# Altium PCB SPECCY2007.PcbDoc (part 2 of 2)
Units mil, origin at the board's own origin, x right, y up, seen from the top; angles counter-clockwise.
Board outline 6000 x 4400 mil, 2 copper layers (Top Layer, Bottom Layer); 54 components, 103 nets, 437 pads, 186 vias.
Unrouted connection lines stored in the file: 2.
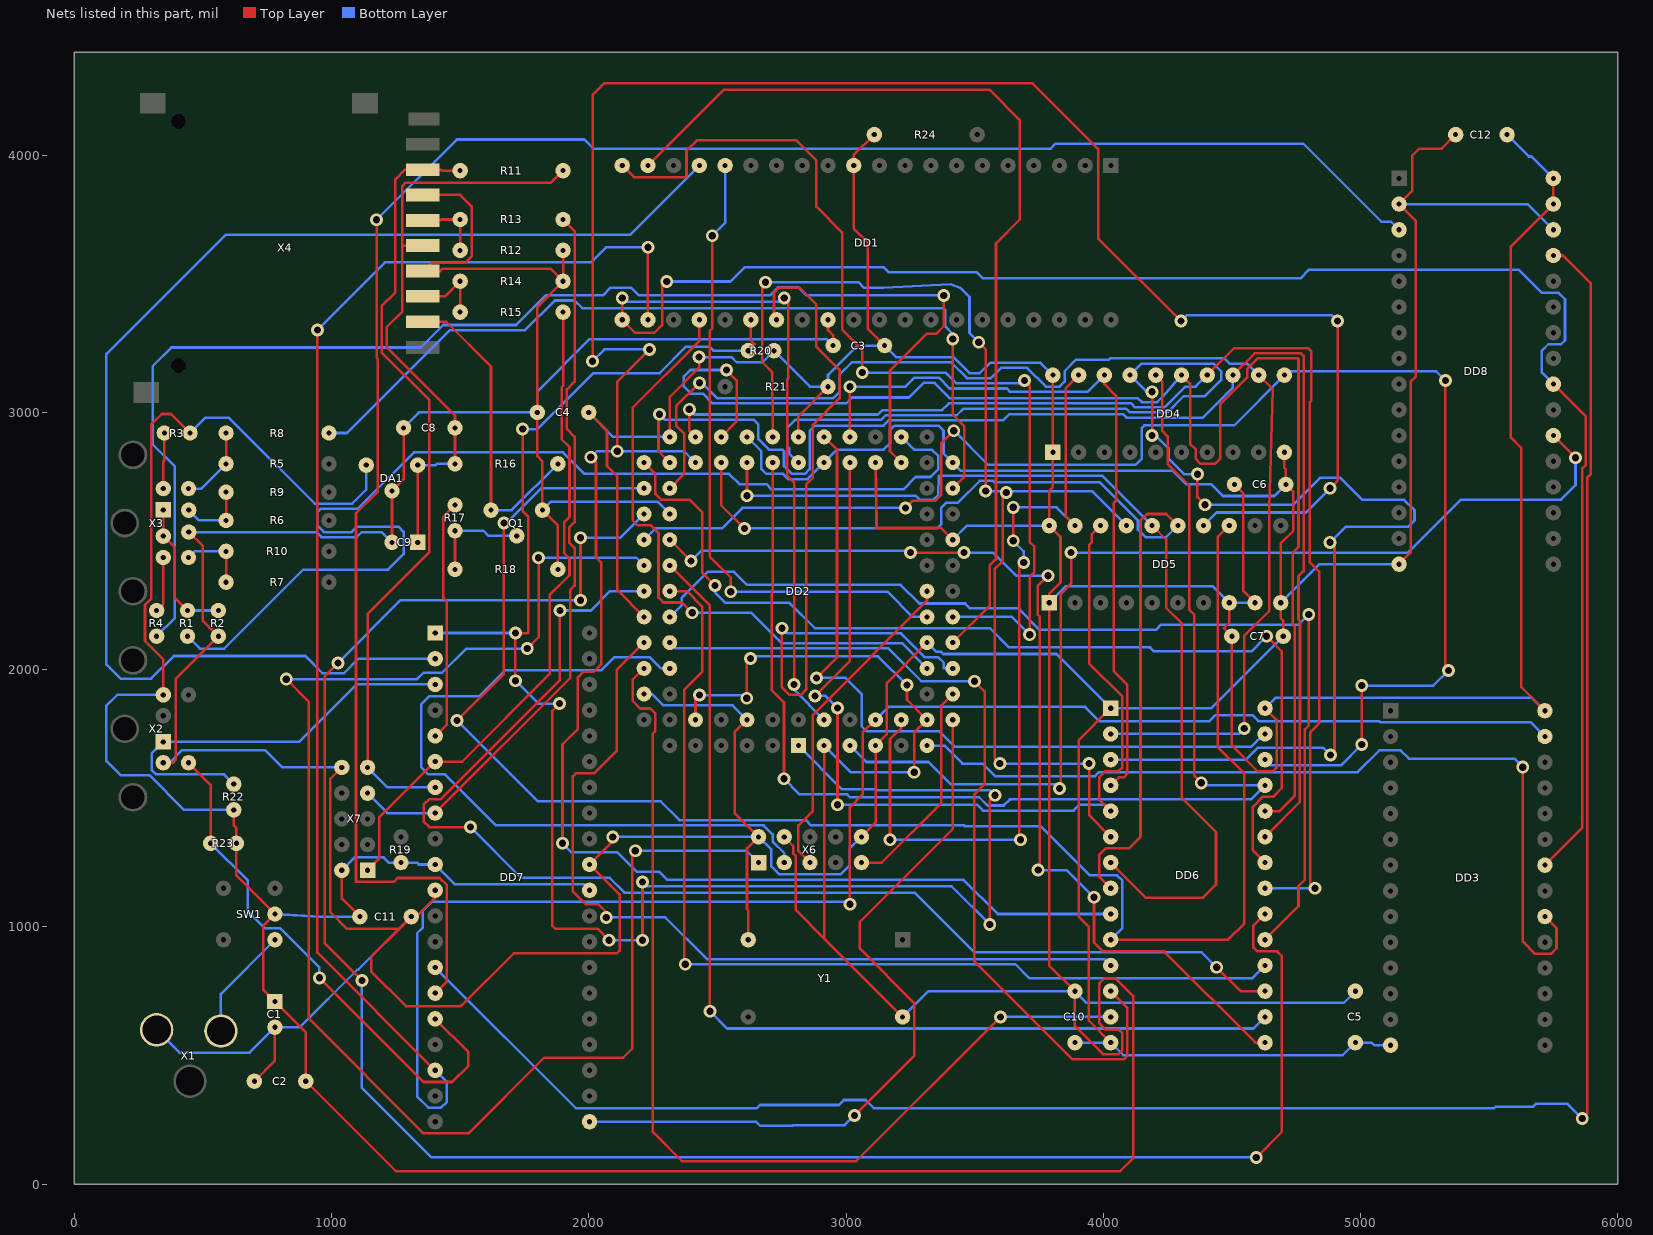
[diagram p2: the nets of this part, all layers, seen from the top]

## Via types
v1: diameter 50, hole 28, Top Layer to Bottom Layer, tented both sides, 186 vias

## Nets (pads, with @x,y where several pads share a name; then routed paths per layer and width w, separated by ;. In a path a pad name is that pad's centre, name@x,y a point inside that pad or via, vN(x,y) a via of type N, cw(c..) or ccw(c..) an arc to the next point about the centre after c; other vN are vias at no path point) (continued)
GND: C1.MINUS C2.2 C3.2 C4.2 C5.2 C6.2 C7.2 C8.2 C9.MINUS C10.2 C11.2 C12.2 DA1.2 DD1.29 DD2.7 DD2.19 DD2.32 DD2.42 DD2.47 DD2.59 DD2.72 DD2.82 DD3.14 DD4.10 DD5.10 DD6.1 DD6.14 DD7.11 DD7.31 DD8.2 DD8.16 DD8.30 Q1.1 R2.2 R12.2 R14.2 R18.1 X1.1 X2.3 X3.4 X4.3 X4.6 X6.2 X6.10 X7.10 Y1.7 | length 26562.1
  Top Layer w10: X2.3@346,1638 383,1638 395,1650 395,1965 R2.2@560,2130 500,2190 500,2480 X3.4@445,2535 ; C2.2@700,400 780,480 C1.MINUS@780,610 ; X7.10@1040,1620 995,1575 995,1057 1060,992 1262,992 ; C9.MINUS@1235,2495 DA1.2@1235,2695 1280,2740 C8.2@1280,2940 ; X4.6@1355,3845.5 1500,3845.5 1545,3800.5 1545,3607 1520,3582 1390.5,3582 X4.3@1358,3549.5 ; DD7.11@1403,1142.48 1403,1112 1331,1040 C11.2@1310,1040 ; R18.1@1880,2390 1880,2560 Q1.1@1820,2620 1820,2810 1800,2830 C4.2@1800,3000 1800,3410 R14.2@1900,3510 ; R12.2@1900,3630 R14.2@1900,3510 ; v1(2093,1350) 2093,1332.48 DD7.31@2003,1242.48 2119.64,1125.84 2119.64,908 2109.13,897.48 1708.48,897.48 1503,692 1289,692 1154,827 1154,884 1262,992 ; DD2.82@2615,1805 2567,1757 2567,1443 X6.2@2660,1350 2615,1305 2615,1070 2620,1065 Y1.7@2620,950 ; DD1.29@2930,3360 2930,3320 2950,3300 C3.2@2950,3260 ; X6.10@3060,1350 3115,1405 DD2.7@3115,1705 3159,1749 3159,1949 DD2.19@3315,2105 ; DD6.14@4029,550.16 3944,635.16 3944,1000.14 3904.04,1040.1 3904.04,1725.2 DD6.1@4029,1850.16 ; C7.2@4700,2130 4700,2190 4690,2200 DD5.10@4690,2260 4690,2491 4739,2540 4739,2691 C6.2@4710,2720 4710,2779 4704.29,2784.71 DD4.10@4704.29,2845 ; DD8.16@5150,2410 5195,2455 5195,3120 5215,3140 5215,3745 DD8.2@5150,3810 5200.63,3860.63 5200.63,3997.84 5227.89,4025.1 5315.1,4025.1 C12.2@5370,4080 ; 1262,992 C11.2@1310,1040 ; 1262,992 C11.2@1310,1040 ; X4.3@1358,3549.5 X4.3@1355,3549.5 X4.3@1358,3549.5 ; X4.3@1358,3549.5 1422,3549.5 1431.5,3559 1851,3559 R14.2@1900,3510
  Bottom Layer w10: X1.1@320,600 409,511 681,511 C1.MINUS@780,610 876.67,610 1100,833.33 1103.33,833.33 C11.2@1310,1040 ; X2.3@346,1638 370,1638 419,1687 742,1687 809,1620 X7.10@1040,1620 ; X3.4@445,2535 941,2535 961,2515 1097.5,2515 1117.5,2535 1195,2535 C9.MINUS@1235,2495 ; C8.2@1280,2940 1340,3000 C4.2@1800,3000 1800,3082.02 2002.98,3285 2925,3285 C3.2@2950,3260 ; Q1.1@1820,2620 1853,2653 2267,2653 DD2.59@2315,2605 ; v1(2093,1350) X6.2@2660,1350 2709.6,1300.4 2709.6,1235.4 2740,1205 2980,1205 3014.31,1239.31 3014.31,1304.31 X6.10@3060,1350 ; DD2.72@2215,1905 2246,1905 2290,1861 2559,1861 DD2.82@2615,1805 ; DD2.47@2615,2905 2671,2849 2671,2780 2690,2761 2755,2761 2775,2741 2851,2741 DD2.42@2915,2805 2965,2855 3146,2855 3171,2880 3171,2932 3188,2949 3359,2949 3379,2929 3379,2841 DD2.32@3415,2805 3446,2774 4268.78,2774 4322.78,2720 4420,2720 4465,2675 4665,2675 C6.2@4710,2720 ; DD2.19@3315,2105 3351,2069 3370,2069 3378,2061 3818.16,2061 DD6.1@4029,1850.16 4420.16,1850.16 C7.2@4700,2130 ; C10.2@3890,550 3959,550 3959.16,550.16 DD6.14@4029,550.16 4078.16,501 4931,501 C5.2@4980,550 5043,550 5052.84,540.16 DD3.14@5117,540.16 ; DD5.10@4690,2260 4840,2410 DD8.16@5150,2410 ; DD8.2@5150,3810 5650,3810 DD8.30@5750,3710
INT: DD1.16 DD2.21 | length 2519.4
  Top Layer w10: v1(2480,3687) 2480,3326 2470,3316 2470,2439.6 2552,2357.6 v1(2552,2303)
  Bottom Layer w10: v1(2480,3687) 2530,3737 DD1.16@2530,3960 ; v1(2552,2303) 3160.61,2303 3258.61,2205 DD2.21@3315,2205
IOREQ: DD1.20 DD2.20 | length 3812.2
  Top Layer w10: DD1.20@2130,3960 2175,3915 2375,3915 2380,3920 2380,4018 2420,4058 2807,4058 2885,3980 2885,3800 2985,3700 2985,3323 3063,3245 v1(3063,3155) ; v1(3694,3124) 3714,3104 3714,2496.77 3731,2479.77 3731,2377 3714,2360 v1(3714,2136)
  Bottom Layer w10: v1(3063,3155) 3386.67,3155 3428.67,3113 3683,3113 v1(3694,3124) ; DD2.20@3415,2205 3645,2205 v1(3714,2136)
KCLK: DD7.16 R23.2 X2.5 | length 2090.8
  Top Layer w10: X2.5@444,1638 530,1552 R23.2@530,1325 ; v1(953,802) 1358,397 1469,397 1532,460 1532,513.48 DD7.16@1403,642.48
  Bottom Layer w10: R23.2@530,1325 675,1180 675,1060 740,995 800,995 953,842 v1(953,802)
KDAT: DD7.3 R22.2 X2.1 | length 1619
  Bottom Layer w10: R22.2@620,1555 582,1593 318,1593 301,1610 301,1674 X2.1@346,1719 874,1719 1097.48,1942.48 DD7.3@1403,1942.48
M1: DD1.27 DD2.16 | length 2984.3
  Top Layer w10: DD1.27@2730,3360 2720,3370 2720,3465 2740,3485 2820,3485 2885,3420 2885,3255 2975,3165 2975,3056 2871,2952 2871,2746 2845,2720 2845,1922 2825,1902 2780,1902 2751,1931 v1(2751,2161)
  Bottom Layer w10: v1(2751,2161) 2771,2141 3214,2141 3306,2049 3358,2049 3380,2027 3380,2005 DD2.16@3415,2005
MISO: DD7.7 R11.2 X4.7 X7.9 | length 3048.1
  Top Layer w10: X7.9@1140,1620 1140,2217.09 1380,2457.09 1380,3047.5 1195,3232.5 1195,3413 1248,3466 1248,3906 1285.5,3943.5 X4.7@1355,3943.5 1425,3943.5 1428.5,3940 R11.2@1500,3940
  Bottom Layer w10: X7.9@1140,1620 1217.52,1542.48 DD7.7@1403,1542.48
MOSI: DD7.6 R15.1 X7.1 | length 2588.6
  Top Layer w10: X7.1@1140,1220 1185,1265 1185,1424.48 DD7.6@1403,1642.48 1508.15,1642.48 1848,1982.33 1848,2290 1925,2367 1925,2431.78 1904,2452.78 1904,2572.78 1925,2593.78 1925,2865 1895,2895 1895,3098 1900,3103 R15.1@1900,3390
MREQ: DD1.19 DD2.18 | length 3755.8
  Top Layer w10: DD1.19@2230,3960 2525,4255 3557,4255 3675,4137 3675,3749 3583,3657 3583,2430 3558,2405 3558,2248 DD2.18@3415,2105
NetC8_1: C8.1 C9.PLUS DA1.1 R11.1 R16.2 X4.4 | length 2647
  Top Layer w10: C9.PLUS@1335,2495 DA1.1@1335,2795 ; X4.4@1355,3648.5 1275,3648.5 ; R16.2@1480,2800 C8.1@1480,2940 1480,2988 1215,3253 1215,3333 1275,3393 ; R11.1@1900,3940 1853,3893 1288,3893 1275,3880 1275,3648.5 ; 1275,3393 1275,3648.5 ; 1275,3393 1275,3648.5
  Bottom Layer w10: DA1.1@1335,2795 1405,2795 1410,2800 R16.2@1480,2800
NetQ1_2: Q1.2 R17.1 R18.2 | length 398.3
  Top Layer w10: R18.2@1480,2390 R17.1@1480,2540
  Bottom Layer w10: R17.1@1480,2540 1590,2540 1610,2520 Q1.2@1720,2520
NetQ1_3: Q1.3 R16.1 X4.1 | length 1230.1
  Top Layer w10: X4.1@1355,3352.5 1446,3352.5 1620,3178.5 Q1.3@1620,2620
  Bottom Layer w10: Q1.3@1620,2620 1700,2620 R16.1@1880,2800
NetR1_2: R1.2 R2.1 X3.1 X3.2 | length 549.9
  Top Layer w10: X3.1@346,2621 X3.2@346,2519 391,2474 391,2279 R1.2@440,2230
  Bottom Layer w10: R1.2@440,2230 R2.1@560,2230
NetR3_2: R3.2 X3.3 | length 217.7
  Top Layer w10: X3.3@346,2704 346,2810 350,2814 R3.2@350,2920
NetR4_2: R4.2 X3.5 | length 216.8
  Top Layer w10: R4.2@320,2230 346,2256 X3.5@346,2436
NetR5_2: R5.2 R8.2 X3.6 | length 305.8
  Top Layer w10: R5.2@590,2800 R8.2@590,2920
  Bottom Layer w10: X3.6@444,2704 494,2704 R5.2@590,2800
NetR6_2: R6.2 R9.2 X3.7 | length 271.6
  Top Layer w10: R6.2@590,2580 R9.2@590,2690
  Bottom Layer w10: X3.7@445,2620 485,2580 R6.2@590,2580
NetR7_2: R7.2 R10.2 X3.8 | length 275.9
  Top Layer w10: R7.2@590,2340 R10.2@590,2460
  Bottom Layer w10: X3.8@444,2436 468,2460 R10.2@590,2460
NetR12_1: R12.1 R13.2 X4.5 | length 266.4
  Top Layer w10: X4.5@1355,3746.5 1425,3746.5 1428.5,3750 R13.2@1500,3750 R12.1@1500,3630
NetR14_1: R14.1 R15.2 X4.2 | length 289.2
  Top Layer w10: X4.2@1355,3451.5 1441.5,3451.5 R14.1@1500,3510 R15.2@1500,3390
NetSW1_1: SW1.1 X1.3 | length 442
  Bottom Layer w10: X1.3@570,595 570,740 SW1.1@780,950
NMI: DD1.17 DD7.2 | length 5204
  Bottom Layer w10: DD7.2@1403,2042.48 1105.48,2042.48 1049,1986 965,1986 898,2053 387,2053 299,1965 180,1965 125,2020 125,3227 588,3690 2160,3690 DD1.17@2430,3960
R: DD2.30 R8.1 | length 3366.7
  Top Layer w10: DD2.30@3415,2705 3459,2749 3459,2948 3415,2992 v1(3415,3286)
  Bottom Layer w10: R8.1@990,2920 1060,2920 1460,3320 1753,3320 1868,3435 1945,3435 1975,3405 3380,3405 3385,3400 3385,3335.54 3415,3305.54 v1(3415,3286)
RAM: DD2.11 DD3.20 | length 3413.3
  Top Layer w10: v1(5631,1621) 5631,943.33 5679.33,895 5740,895 5762,917 5762,995.16 DD3.20@5717,1040.16
  Bottom Layer w10: DD2.11@3315,1705 3382.34,1705 3452.34,1635 3530.93,1635 3580,1585.93 3968.04,1585.93 3984.04,1601.93 4988.93,1601.93 5073,1686 5156,1686 5188,1654 5598,1654 v1(5631,1621)
RD: DD1.21 DD2.4 DD3.22 DD8.24 | length 8797.8
  Top Layer w10: v1(2130,3445) DD1.21@2130,3360 2180.32,3309.68 2254.68,3309.68 2285,3340 2285,3491 v1(2303,3509) ; v1(2760,3445) 2775,3430 2775,3131 2771,3127 2771,2755 2798,2728 v1(2798,1942) ; DD3.22@5717,1240.16 5862,1385.16 5862,2781.47 5876,2795.47 5876,2984 DD8.24@5750,3110
  Bottom Layer w10: v1(2130,3445) 2145,3430 2745,3430 v1(2760,3445) ; v1(2303,3509) 2551,3509 2607,3565 3145.1,3565 3165,3545.1 3508.1,3545.1 3531.95,3521.25 4766.91,3521.25 4800.66,3555 5615,3555 5705,3465 5770,3465 5795,3440 5795,3280 5780,3265 5730,3265 5705,3240 5705,3155 DD8.24@5750,3110 ; v1(2798,1942) 2798,1922 DD2.4@2915,1805
ROM: DD2.5 DD8.22 | length 4118
  Top Layer w10: v1(3830,1538) 3835,1543 3835,2295 3875,2335 v1(3875,2455) ; DD8.22@5750,2910 v1(5836,2824)
  Bottom Layer w10: DD2.5@3015,1705 3079,1641 3320.26,1641 3406.55,1554.71 3813.29,1554.71 v1(3830,1538) ; v1(3875,2455) 5185,2455 5391,2661 5780,2661 5836,2717 v1(5836,2824)
ROM0: DD7.14 DD8.29 | length 8194.1
  Top Layer w10: DD8.29@5750,3610 5787.42,3610 5896,3501.42 5896,2761.47 5882,2747.47 5882,275 v1(5862,255)
  Bottom Layer w10: DD7.14@1403,842.48 1950.48,295 2653.6,295 2666.19,307.59 2972.59,307.59 2992,327 3076,327 3108,295 5520,295 5525.91,300.91 5671.25,300.91 5682,311.66 5805.34,311.66 v1(5862,255)
ROM1: DD7.15 DD8.3 | length 7686.4
  Top Layer w10: v1(1175,3749) 1175,3212.5 1180,3207.5 1180,2693 1095,2608 1095,1175 1242,1175 1257,1190 1420,1190 1448,1162 1448,787.48 DD7.15@1403,742.48
  Bottom Layer w10: v1(1175,3749) 1487,4061 1983,4061 2019,4025 3794.9,4025 3814.9,4045 4777.58,4045 5081.29,3741.29 5118.71,3741.29 DD8.3@5150,3710
RST_CPU: DD1.26 DD2.1 DD7.1 R20.2 | length 6978.9
  Top Layer w10: v1(1715,1957) v1(1715,2142) 1762,2142 1765,2145 1765,2594 1743,2616 v1(1743,2935) ; v1(1886,1868) 1858,1840 1858,1005 1871,992 2035,992 v1(2079,948) ; v1(2209,948) v1(2209,1175) ; R20.2@2620,3240 2645,3265 2630,3280 DD1.26@2630,3360 ; v1(3559,1009) 3559,1492 v1(3579,1512)
  Bottom Layer w10: DD7.1@1417.52,2157 DD7.1@1403,2142.48 1714.52,2142.48 v1(1715,2142) ; v1(1715,1957) 1804,1868 v1(1886,1868) ; v1(1743,2935) 1800,2935 2017.86,3152.86 2276,3152.86 2378.66,3255.51 2469,3255.51 2484.51,3240 R20.2@2620,3240 ; v1(2079,948) v1(2209,948) ; v1(2209,1175) 2226,1158 3410,1158 v1(3559,1009) ; DD2.1@2815,1705 2985,1535 3114.5,1535 3117.5,1532 3559,1532 v1(3579,1512)
SCK: DD7.8 R13.1 X7.7 | length 2888
  Top Layer w10: DD7.8@1403,1442.48 1928,1967.48 1928,2310.05 1945,2327.05 1945,2473 1924,2494 1924,2552.78 1945,2573.78 1945,2905 1915,2935 1915,3089.46 1945,3119.46 1945,3705 R13.1@1900,3750
  Bottom Layer w10: X7.7@1140,1520 1217.52,1442.48 DD7.8@1403,1442.48
SDC: DD7.5 R17.2 | length 940.2
  Top Layer w10: DD7.5@1403,1742.48 1448,1787.48 1448,2266 1435,2279 1435,2595 R17.2@1480,2640
SOUND: DD2.35 R1.1 | length 4341.2
  Bottom Layer w10: R1.1@440,2130 488,2082 583,2082 890,2389 1220,2389 1280,2449 1280,2536 1260,2556 1099,2556 1078,2535 970,2535 945,2560 945,2612 958,2625 1100,2625 1320,2845 1900,2845 1984,2761 2545.66,2761 2585.66,2721 2691,2721 2711,2701 3223,2701 3271,2749 3328,2749 3359,2780 3359,2830 3334.61,2854.39 3265.61,2854.39 DD2.35@3215,2905
SYNC: DD2.36 R4.1 | length 5130.7
  Top Layer w10: DD2.36@3215,2805 3171,2849 3171,3162.28 3315,3306.28 3351.28,3306.28 3380,3335 v1(3380,3455)
  Bottom Layer w10: R4.1@320,2130 391,2201 391,2789 305,2875 305,3180 377.5,3252.5 1346.84,3252.5 1434.34,3340 1717.5,3340 1832.5,3455 2055,3455 2085,3485 2165,3485 2195,3455 2703.72,3455 2734.92,3486.19 2814.92,3486.19 2846.11,3455 v1(3380,3455)
TAPE_IN: DD2.12 DD7.21 | length 2924
  Top Layer w10: v1(3033,267) 3265,499 3265,705 3054,916 3054,1020 3415,1381 DD2.12@3415,1805
  Bottom Layer w10: DD7.21@2003,242.48 2650.52,242.48 2666,227 2792,227 2794,229 2995,229 v1(3033,267)
TCK: DD2.62 X6.1 | length 5986.8
  Top Layer w10: v1(824,1963) 912,1875 912,643 1358,197 1532,197 1827,492 2134,492 2169,527 2169,1284 v1(2181,1296) ; v1(1761,2082) 1805,2126 v1(1805,2435)
  Bottom Layer w10: v1(824,1963) 1333,1963 1358,1988 1430,1988 1524,2082 v1(1761,2082) ; v1(1805,2435) 2185,2435 DD2.62@2215,2405 ; v1(2181,1296) 2614,1296 X6.1@2660,1250
TDI: DD2.14 X6.9 | length 848.3
  Top Layer w10: X6.9@3060,1250 3138.91,1250 3371,1482.09 3371,1861 DD2.14@3415,1905
TDO: DD2.71 X6.3 | length 2908.4
  Bottom Layer w10: DD2.71@2315,2005 2280,2005 2236,2049 2100,2049 2048,1997 1675,1997 1575,1897 1380,1897 1349,1866 1349,1620 1376,1593 1442,1593 1640,1395 2680,1395 2715,1360 2715,1331.36 2760,1286.36 X6.3@2760,1250
TMS: DD2.23 X6.5 | length 1280.7
  Top Layer w10: X6.5@2860,1250 2815,1295 2815,1395 2871,1451 2871,1824.58 3315,2268.58 DD2.23@3315,2305
VA0: DD2.56 DD5.13 DD6.10 | length 6690.6
  Top Layer w10: v1(1488,1802) 1670,1984 v1(1670,2570) ; DD6.10@4029,950.16 4485.16,950.16 4549,1014 4549,1596 4445,1700 4445,2515 DD5.13@4490,2560
  Bottom Layer w10: v1(1488,1802) 1802,1488 2279.79,1488 2352.79,1415 2844.1,1415 2864.1,1395 3459,1395 3462,1392 3757,1392 3949,1200 4054,1200 4074,1180 4074,995.16 DD6.10@4029,950.16 ; v1(1670,2570) 1680,2570 1815,2705 DD2.56@2215,2705
VA1: DD2.52 DD5.14 DD6.9 | length 10998.6
  Top Layer w10: v1(1898,1325) 1898,1710 1958,1770 1958,1970 1980,1992 2020,1992 2048,2020 2048,2417 2028,2437 2028,2806 v1(2008,2826) ; v1(2015,3199) 2015,4234 2060,4279 3725,4279 3980,4024 3980,3677 v1(4302,3355) ; v1(2111,2849) 2111,3120 v1(2236,3245) ; v1(4882,2705) 4911,2734 v1(4911,3355)
  Bottom Layer w10: v1(1898,1325) 1933,1290 2111.46,1290 2186.41,1215.05 2273.68,1215.05 2305.73,1183 3457.16,1183 3590,1050.16 DD6.9@4029,1050.16 ; v1(2008,2826) 2031,2849 v1(2111,2849) ; v1(2015,3199) 2061,3245 v1(2236,3245) ; DD2.52@2415,2805 2371,2849 ; v1(4302,3355) 4324.09,3377.09 4888.91,3377.09 v1(4911,3355) ; DD5.14@4390,2560 4441,2611 4788,2611 v1(4882,2705) ; v1(2111,2849) 2371,2849 ; v1(2111,2849) 2371,2849
VA2: DD2.50 DD5.15 DD6.8 | length 3964.7
  Top Layer w10: DD2.50@2515,2805 2515,2639 v1(2605,2549) ; DD6.8@4029,1150.16 3984,1195.16 3984,1280 4009,1305 4100,1305 4145,1350 4145,2580 4170,2605 4245,2605 DD5.15@4290,2560
  Bottom Layer w10: v1(2605,2549) 3354,2549 3371,2566 3371,2630 3390,2649 3435,2649 3520,2734 3572,2734 3577,2729 3986,2729 4135,2580 4135,2545 4165,2515 4245,2515 DD5.15@4290,2560
VA3: DD2.48 DD5.16 DD6.7 | length 3855.1
  Top Layer w10: v1(2615,2676.22) DD2.48@2615,2805 ; DD6.7@4029,1250.16 4165.16,1114 4387.91,1114 4438.33,1164.42 4438.33,1368.61 4304.5,1502.44 4304.5,2180.5 4245,2240 4245,2505 DD5.16@4190,2560
  Bottom Layer w10: v1(2615,2676.22) 3271,2676.22 3286.22,2661 3340,2661 3359,2680 3361.29,2754 3996,2754 DD5.16@4190,2560
VA4: DD2.45 DD5.17 DD6.6 | length 4910.1
  Top Layer w10: v1(2687.19,3506.19) 2675,3494 2675,3195 2714,3156 2715,2954 DD2.45@2715,2905 ; v1(3516,3273) 3543,3246 v1(3543,2694) ; v1(3598,1635) 3578,1655 3578,2391 3610,2423 3610,2676 v1(3623,2689) ; v1(3945,1635) 3945,1434.16 DD6.6@4029,1350.16
  Bottom Layer w10: v1(2687.19,3506.19) 3048.81,3506.19 3070.5,3484.5 3144.4,3484.5 3406.55,3497.46 3442.9,3485.1 3480,3448 3480,3309 v1(3516,3273) ; v1(3543,2694) v1@3623,2694 ; v1(3598,1635) v1(3945,1635) ; v1(3623,2689) v1@3623,2694 ; DD5.17@4090,2560 3956,2694 ; v1@3623,2694 3956,2694 ; v1@3623,2694 3956,2694
VA5: DD2.40 DD5.18 DD6.5 | length 3804.3
  Top Layer w10: v1(2880,1898) 3015,2033 DD2.40@3015,2805 ; v1(2967,1475) v1(2967,1851) ; DD5.18@3990,2560 3955,2525 3955,2495 3945,2485 3945,2024.16 4074,1895.16 4074,1619.16 4060,1605.16 4009.16,1605.16 3984,1580 3984,1495.16 DD6.5@4029,1450.16
  Bottom Layer w10: v1(2880,1898) 2920,1898 v1(2967,1851) ; v1(2967,1475) 3508.82,1475 3531.82,1452 3884.87,1452 3907.87,1475 4004.16,1475 DD6.5@4029,1450.16
VA6: DD2.39 DD4.18 DD6.4 | length 2926.4
  Top Layer w10: DD2.39@3015,2905 v1(3015,3100) ; DD4.18@4004.29,3145 4004.29,3109.71 4050,3064 4050,2657 4041,2648 4041,1993 4094,1940 4094,1595.45 4080,1581.45 4060.29,1581.45 DD6.4@4029,1550.16
  Bottom Layer w10: v1(3015,3100) 3231,3100 3266,3135 3361,3135 3403,3093 3625,3093 3638,3080 3939.29,3080 DD4.18@4004.29,3145
VA7: DD2.44 DD4.17 DD6.3 | length 6062.7
  Top Layer w10: v1(4190,2910) v1(4190,3080) ; v1(4366,2760) 4366,2671 v1(4396,2641) ; v1(4882,2495) 4899,2478 4899,1683 v1(4884,1668)
  Bottom Layer w10: DD2.44@2815,2805 2779,2841 2779,2861 2771,2869 2771,2940 2803,2972 3137.33,2972 3154.33,2989 3430.5,2989 3456.5,3015 4089.29,3015 4104.29,3000 4250,3000 4313,3063 4395.02,3063 4458,3125.98 4458,3160 4428,3190 4149.29,3190 DD4.17@4104.29,3145 4169.29,3080 v1(4190,3080) ; DD6.3@4029,1650.16 4554.16,1650.16 4600,1696 4856,1696 v1(4884,1668) ; v1(4190,2910) 4204,2910 4254,2860 4254,2820 4314,2760 v1(4366,2760) ; v1(4396,2641) 4737,2641 4841.79,2745.79 4922,2745.79 5007.79,2660 5170,2660 5210,2620 5210,2580 5185,2555 4942,2555 v1(4882,2495)
VA8: DD2.46 DD4.16 DD6.25 | length 5106.3
  Top Layer w10: DD2.46@2715,2805 2715,2309 2711,2305 2711,1921 2759,1873 v1(2759,1576) ; DD4.16@4204.29,3145 4230,3119.29 4230,2927 4250,2907 4250,2800 4335,2715 4335,2232.48 4354,2213.48 4354,1587 v1(4381,1560)
  Bottom Layer w10: v1(2759,1576) 2820,1515 3004,1515 3015,1504 3518,1504 3550,1472 3613,1472 3637,1496 4574.84,1496 DD6.25@4629,1550.16 4390.84,1550.16 v1(4381,1560)
VA9: DD2.49 DD4.15 DD6.24 | length 5510.3
  Top Layer w10: DD2.49@2515,2905 2575,2965 2575,3125 v1(2535,3165) ; DD4.15@4304.29,3145 4338,3111.29 4338,2878 4359,2857 4359,2820 4379,2800 4435,2800 4455,2820 4455,3032 4559.29,3136.29 4559.29,3169.29 4600,3210 4755.61,3210 4759,3206.61 4759,2477 4736,2454 4736,2175 4745,2166 4745,1809 4744,1808 4744,1509.14 4685.01,1450.16 DD6.24@4629,1450.16
  Bottom Layer w10: v1(2535,3165) 2395,3165 2370,3140 2370,3100 2397,3073 2443.8,3073 2481.8,3035 3001,3035 3024,3058 3245,3058 3302,3115 3344.47,3115 3404.47,3055 4135,3055 4150,3040 4210,3040 4230,3060 DD4.15@4304.29,3145
VA10: DD2.51 DD4.14 DD6.21 | length 4989.3
  Top Layer w10: v1(2391,3012) 2391,2929 DD2.51@2415,2905 ; DD4.14@4404.29,3145 4509.29,3250 4795.61,3250 4809.29,3236.31 4809.29,3046.76 4802,3039.47 4802,2418 4839,2381 4839,1791 4804,1756 4804,1169.16 v1(4823,1150.16)
  Bottom Layer w10: v1(2391,3012) 2411,2992 3124,2992 3141,3009 3374,3009 3400,3035 4109.29,3035 4124.29,3020 4239,3020 4319,3100 4359.29,3100 DD4.14@4404.29,3145 ; DD6.21@4629,1150.16 v1(4823,1150.16)
VA11: DD2.55 DD4.13 DD6.23 | length 5135.6
  Top Layer w10: v1(2275,2993) 2271,2989 2271,2849 DD2.55@2315,2805 ; DD4.13@4504.29,3145 4589.29,3230 4768.65,3230 4779,3219.65 4779,2383.43 4759,2363.43 4759,2195 4765,2189 4765,1788 4764,1787 4764,1485.16 DD6.23@4629,1350.16
  Bottom Layer w10: v1(2275,2993) 2296,2972 2640,2972 2659,2953 2659,2896 2700,2855 2753,2855 2759,2849 2759,2791.54 2789.54,2761 2840,2761 2859,2780 2859,2928 2880,2949 3145.83,2949 3165.83,2969 3610.73,2969 3634.73,2993 4077,2993 4090,2980 4387,2980 4504.29,3097.29 DD4.13@4504.29,3145
VA12: DD2.57 DD4.12 DD6.2 | length 4912.9
  Top Layer w10: DD2.57@2315,2705 2371,2761 2371,2918.56 2339.83,2949.73 2339.83,3024.83 v1(2430,3115) ; v1(4548,1771) 4548,2130 4645,2227 4645,2627 4659,3090.29 DD4.12@4604.29,3145
  Bottom Layer w10: v1(2430,3115) 2439.6,3115 2499.6,3055 2950,3055 2975,3080 2975,3147 3023,3195 3408,3195 3470,3133 3563,3133 3602.99,3172.99 3704.01,3172.99 3777,3100 3830,3100 3850,3120 3850,3160 3895,3205 4022.14,3205 4027.14,3210 4471,3210 4491,3190 4559.29,3190 DD4.12@4604.29,3145 ; DD6.2@4029,1750.16 4527.16,1750.16 v1(4548,1771)
VA13: DD2.60 DD4.11 DD6.26 | length 5848.5
  Top Layer w10: v1(3231,2629) 3258,2656 3347,2656 3371,2680 3371,2881 v1(3419,2929) ; v1(5005,1709) v1(5005,1938) ; v1(5330,3124) 5330,2009 v1(5342,1997)
  Bottom Layer w10: DD2.60@2215,2505 2259,2549 2517.41,2549 2597.41,2629 v1(3231,2629) ; v1(3419,2929) 3551,2797 4127,2797 4150,2820 4150,2940 4160,2950 4509.29,2950 DD4.11@4704.29,3145 4704.29,3160 5294,3160 v1(5330,3124) ; DD6.26@4629,1650.16 4651.16,1628 4924,1628 v1(5005,1709) ; v1(5005,1938) 5283,1938 v1(5342,1997)
VAGEN: DD2.10 DD4.19 DD5.19 | length 3198.2
  Top Layer w10: v1(3171,1339) 3171,1730 3215,1774 DD2.10@3215,1805 ; v1(3650,2501) v1(3650,2631) ; v1(3678,1339) 3674,1343 3674,2400 v1(3691,2417) ; DD5.19@3890,2560 3855,2595 3855,3095.71 DD4.19@3904.29,3145
  Bottom Layer w10: v1(3171,1339) v1(3678,1339) ; v1(3650,2501) 3691,2460 v1(3691,2417) ; v1(3650,2631) 3819,2631 DD5.19@3890,2560
VCC: C1.PLUS C2.1 C3.1 C4.1 C5.1 C6.1 C7.1 C10.1 C11.1 C12.1 DA1.3 DD1.11 DD2.3 DD2.13 DD2.26 DD2.38 DD2.43 DD2.53 DD2.66 DD2.78 DD3.28 DD4.1 DD4.20 DD5.1 DD5.8 DD5.9 DD5.20 DD6.28 DD7.10 DD7.30 DD8.31 DD8.32 R3.1 R19.1 R20.1 R21.1 R22.1 R23.1 R24.1 SW1.2 X2.4 X6.4 X7.2 Y1.14 | length 30536.7
  Top Layer w10: X2.4@346,1902 346,2040.36 275,2111.36 275,2251.59 299,2275.59 299,2953 340,2994 376,2994 R3.1@450,2920 ; R22.1@620,1455 620,1395 630,1385 R23.1@630,1325 630,1200 SW1.2@780,1050 735,1005 735,755 C1.PLUS@780,710 900,590 C2.1@900,400 1250,50 4066,50 4116,100 4116,732 4048,800 4004,800 3984,780 3984,626 4010,600 4061,600 4074,587 4074,519.16 4060,505.16 3998.84,505.16 3890,614 C10.1@3890,750 3790,850 DD5.1@3790,2260 3790,2295 3834,2339 3834,2516 DD5.20@3790,2560 3790,2695 3804.29,2709.29 DD4.1@3804.29,2845 DD4.20@3804.29,3145 ; X7.2@1040,1220 1040,1110 C11.1@1110,1040 ; C4.1@2000,3000 2071,2929 2071,2791.58 2111,2751.58 2111,2309 DD2.66@2215,2205 ; DD2.53@2315,2905 2315,3061 2429,3175 v1(2429,3215) ; DD2.78@2415,1805 2415,1885 v1(2431,1901) ; v1(2614,1889) 2614,2028 v1(2629,2043) ; X6.4@2760,1350 2795,1315 2795,1285 2805,1275 2805,1065 2915,955 ; DD2.43@2815,2905 2815,2985 R21.1@2930,3100 ; DD2.3@2915,1705 2915,955 ; R24.1@3110,4080 3030,4000 DD1.11@3030,3960 3030,3715 3085,3660 3085,3325 C3.1@3150,3260 ; DD2.38@3115,2805 3118.49,2551.51 3368.49,2551.51 DD2.26@3415,2505 ; v1(3237,1940) 3237,1883 DD2.13@3315,1805 3265,1755 v1(3265,1601) ; DD5.8@4490,2260 4490,2183 4468.5,2161.5 C7.1@4500,2130 4500,1705 4600,1605 4660,1605 4674,1619 4674,1805.16 DD6.28@4629,1850.16 ; C6.1@4510,2720 4545,2685 4545,2305 DD5.9@4590,2260 ; DD3.28@5717,1840.16 5625,1932.16 5625,2862 5585,2902 5585,3645 DD8.31@5750,3810 DD8.32@5750,3910 ; 2915,955 Y1.14@3220,650 2915,955
  Bottom Layer w10: X2.4@346,1902 167,1902 125,1860 125,1645 180,1590 292,1590 427,1455 R22.1@620,1455 ; R3.1@450,2920 510,2980 600,2980 935,2645 1080,2645 1135,2700 DA1.3@1135,2795 ; SW1.2@780,1050 955,1040 C11.1@1110,1040 ; X7.2@1040,1220 1090,1270 1202,1270 1222,1250 R19.1@1270,1250 1332,1250 1339.52,1242.48 DD7.10@1403,1242.48 1480.48,1165 1980.48,1165 DD7.30@2003,1142.48 ; C4.1@2000,3000 2095,2905 DD2.53@2315,2905 ; v1(2429,3215) 2555,3215 2575,3195 2675,3195 R20.1@2720,3240 2860,3100 R21.1@2930,3100 2930,3146 3044,3260 C3.1@3150,3260 3195,3215 3418,3215 3480,3153 3520,3153 3559.99,3192.99 3756.3,3192.99 DD4.20@3804.29,3145 ; v1(2431,1901) 2602,1901 v1(2614,1889) ; v1(2629,2043) 2638,2052 3125,2052 v1(3237,1940) ; DD2.3@2915,1705 3019,1601 v1(3265,1601) ; Y1.14@3220,650 3320,750 C10.1@3890,750 3935,705 4935,705 C5.1@4980,750 ; DD2.26@3415,2505 3470,2560 DD5.20@3790,2560 ; DD5.1@3790,2260 3855,2325 4425,2325 DD5.8@4490,2260 DD5.9@4590,2260 ; DD6.28@4629,1850.16 4668.84,1890 5667.16,1890 DD3.28@5717,1840.16 ; C12.1@5570,4080 5655,3995 5665,3995 DD8.32@5750,3910
VD0: DD2.68 DD6.11 | length 3345.4
  Top Layer w10: v1(2068,1037) 2068,1057 2037.52,1087.48 1988.52,1087.48 1938,1138 1938,1585 1950,1597 2021.16,1597 2108,1683.84 2108,1998 DD2.68@2215,2105
  Bottom Layer w10: v1(2068,1037) 2297.4,1037 2459.4,875 4004.16,875 DD6.11@4029,850.16
VD1: DD2.69 DD6.12 | length 3404.7
  Top Layer w10: v1(3499,1955) 3539,1915 3539,1554.71 3499,1514.71 3499,866 3879.84,485.16 4080,485.16 4094,499.16 4094,685.16 DD6.12@4029,750.16
  Bottom Layer w10: DD2.69@2315,2105 2337,2083 3165,2083 3293,1955 v1(3499,1955)
VD2: DD2.70 DD6.13 | length 3944.5
  Top Layer w10: DD2.70@2215,2005 2171,1961 2171,1878 2200,1849 2240,1849 2259,1830 2259,1761 2249,1751 2249,202 2362.05,88.95 3039.26,88.95 v1(3600.47,650.16)
  Bottom Layer w10: v1(3600.47,650.16) DD6.13@4029,650.16
VD3: DD2.61 DD6.15 | length 3991.5
  Top Layer w10: DD2.61@2315,2505 v1(2398,2422) ; v1(3251,2455) v1(3459,2455) ; v1(3747,1221) 3754,1228 3754,2206 3745,2215 3745,2325 v1(3785,2365) ; v1(3964,1115) 3964,940 3999,905 4236.74,905 4591.58,550.16 DD6.15@4629,550.16
  Bottom Layer w10: v1(2398,2422) 2439,2463 3243,2463 v1(3251,2455) ; v1(3459,2455) 3572.05,2455 3662.05,2365 v1(3785,2365) ; v1(3747,1221) 3858,1221 v1(3964,1115)
VD4: DD2.63 DD6.16 | length 4002.1
  Top Layer w10: DD2.63@2315,2405 2471,2249 v1(2471,672)
  Bottom Layer w10: v1(2471,672) 2538,605 4583.84,605 DD6.16@4629,650.16
VD5: DD2.64 DD6.17 | length 4968.3
  Top Layer w10: v1(1540,1388) 1380,1388 1358,1410 1358,1475 1380,1497 1425,1497 1888,1960 v1(1888,2230) ; v1(4441,843) 4533.84,750.16 DD6.17@4629,750.16
  Bottom Layer w10: v1(1540,1388) 1737,1191 2081,1191 2139,1133 3267,1133 3499,901 4383,901 v1(4441,843) ; v1(1888,2230) 2008,2230 2083,2305 DD2.64@2215,2305
VD6: DD2.65 DD6.18 | length 3869.1
  Top Layer w10: DD2.65@2315,2305 2381,2305 2442,2244 2442,1992 2371,1921 2371,859 v1(2375,855)
  Bottom Layer w10: v1(2375,855) 3658,855 3712,801 4579.84,801 DD6.18@4629,850.16
VD7: DD2.67 DD6.19 | length 4026.2
  Top Layer w10: DD6.19@4629,950.16 4759.19,1080.35 4759.19,1158.4 4784,1183.21 4784,1768 4799,1783 v1(4799,2215)
  Bottom Layer w10: DD2.67@2315,2205 2362,2252 2362,2280 2462,2380 2565,2380 2615,2330 3212,2330 3284.87,2257.13 3463,2257.13 3482.13,2238 3670,2238 3753,2155 4205,2155 4225,2175 4759,2175 v1(4799,2215)
VRAM: DD2.58 DD6.20 | length 7991.1
  Top Layer w10: v1(1025,2026) 973,1974 973,937 v1(1118,792) ; v1(1968,2270) v1(1968,2513) ; v1(4595,104) 4694,203 4694,887 4676,905 4599,905 4584,920 4584,1005.16 DD6.20@4629,1050.16
  Bottom Layer w10: v1(1025,2026) 1269,2270 v1(1968,2270) ; v1(1118,792) 1118,374 1388,104 v1(4595,104) ; v1(1968,2513) 2123,2513 DD2.58@2215,2605
VRD: DD2.54 DD6.22 | length 3942.2
  Top Layer w10: DD2.54@2215,2805 2259,2761 2259,2682 2280,2661 2392,2661 2441,2612 2441,2377 v1(2491,2327) ; DD6.22@4629,1250.16 4581.53,1297.63 4581.53,1466.69 4620,1505.16 4660,1505.16 4694,1539.16 4694,2071 v1(4635,2130)
  Bottom Layer w10: v1(2491,2327) 2491,2300 2531,2260 2780,2260 2879,2161 3560,2161 3634,2087 4182,2087 4198,2071 4576,2071 v1(4635,2130)
VWR: DD2.41 DD6.27 | length 2937.9
  Top Layer w10: v1(2885,1968) 2965,2048 2965,2855 DD2.41@2915,2905
  Bottom Layer w10: v1(2885,1968) 2998,1968 3061,1905 3061,1780 3080,1761 3362,1761 3422,1701 4575.73,1701 4599.38,1724.65 DD6.27@4629,1750.16
WAIT_CPU: DD1.24 DD2.17 | length 2417.1
  Top Layer w10: v1(2402,2221) 2362,2261 2290,2261 2271,2280 2271,2532 2242,2561 2190,2561 2171,2580 2171,3018.51 2430,3277.51 DD1.24@2430,3360
  Bottom Layer w10: v1(2402,2221) 2632,2221 2750,2103 3217,2103 DD2.17@3315,2005
WR: DD1.22 DD2.8 DD3.27 DD7.18 | length 10909.9
  Top Layer w10: v1(945,3321) 945,900.48 DD7.18@1403,442.48 ; DD1.22@2230,3360 v1(2230,3642) ; v1(3015,1088) 3015,1465 3065,1515 3065,1755 DD2.8@3115,1805
  Bottom Layer w10: v1(945,3321) 1207,3583 2008,3583 2067,3642 v1(2230,3642) ; DD7.18@1403,442.48 1448,397.48 1448,320 1425,297 1376,297 1333,340 1333,975.29 1355,997.29 1355,1063 1389.19,1097.19 3005.81,1097.19 v1(3015,1088) ; DD2.8@3115,1805 3165,1855 3929,1855 3984,1800 4412.3,1800 4435.8,1823.5 4580,1823.5 4603.5,1800 5072,1800 5077,1795 5662.16,1795 DD3.27@5717,1740.16
pads on no net: DD1.18 DD1.23 DD1.28 DD2.2 DD2.31 DD2.37 DD2.84 DD5.11 DD5.12 DD7.12 DD7.32 DD8.1 SW1.3 SW1.4 SW1.5 X1.2 X2.2 X2.6 X2.M1 X2.M2 X2.M3 X3.M1 X3.M2 X3.M3 X4.8 X4.9 X4.10 X4.11 X4.12 X4.13 X4.14 X4.15 X6.6 X6.7 X6.8 X7.3 X7.4 X7.6 X7.8 Y1.1

## Keep-outs
Keep-Out Layer:
  the board outline again, w10

## Text inside footprints (layer, text, board x,y; h text height)
DD2: Top Overlay "1" at 2801.12,1586.87 h67.5; Mechanical 1 "75" at 2287.22,1586.87 h67.5; Mechanical 1 "54" at 2096.87,2845.28 h67.5 r270; Mechanical 1 "33" at 3342.78,3023.13 h67.5 r180; Mechanical 1 "12" at 3533.13,1777.22 h67.5 r90; Mechanical 1 "1" at 2801.12,1586.87 h67.5
X2: Top Overlay "4" at 304.12,1892.62 h67.5 r90; Top Overlay "6" at 591.63,1892.62 h67.5 r90; Top Overlay "3" at 304.12,1617.62 h67.5 r90; Top Overlay "1" at 304.12,1705.12 h67.5 r90; Top Overlay "2" at 304.12,1805.12 h67.5 r90; Top Overlay "5" at 591.63,1617.62 h67.5 r90
X3: Top Overlay "8" at 591.63,2418.62 h67.5 r90; Top Overlay "6" at 591.63,2693.62 h67.5 r90; Top Overlay "3" at 304.12,2693.62 h67.5 r90; Top Overlay "1" at 304.12,2606.12 h67.5 r90; Top Overlay "2" at 304.12,2506.12 h67.5 r90; Top Overlay "4" at 591.63,2518.62 h67.5 r90; Top Overlay "7" at 591.63,2606.12 h67.5 r90; Top Overlay "5" at 304.12,2418.62 h67.5 r90
X6: Top Overlay "1" at 2546.12,1219.37 h67.5
X7: Top Overlay "1" at 1170.63,1106.12 h67.5 r90